# EAGLE board prod plus l-filters v2 (EAGLE 8.0.2)
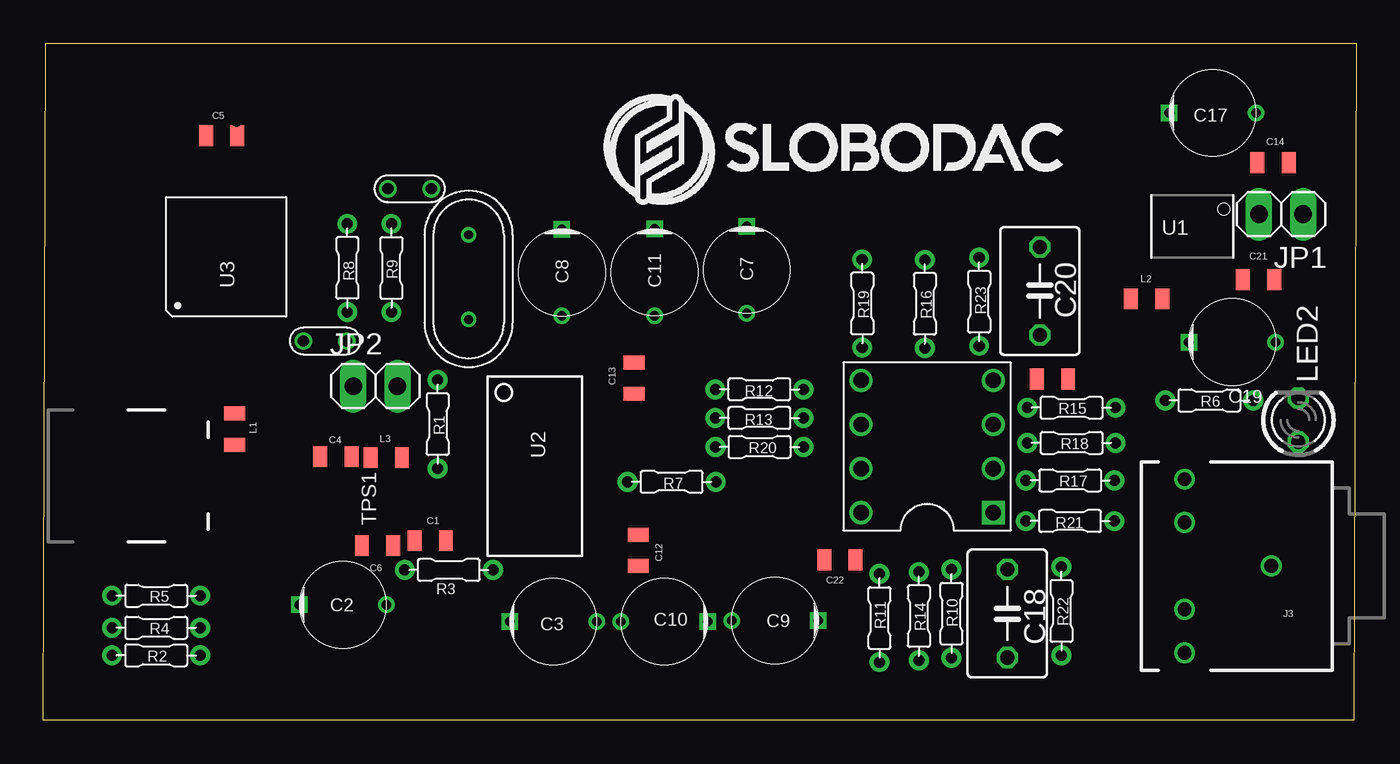
[diagram p0: board, top side]
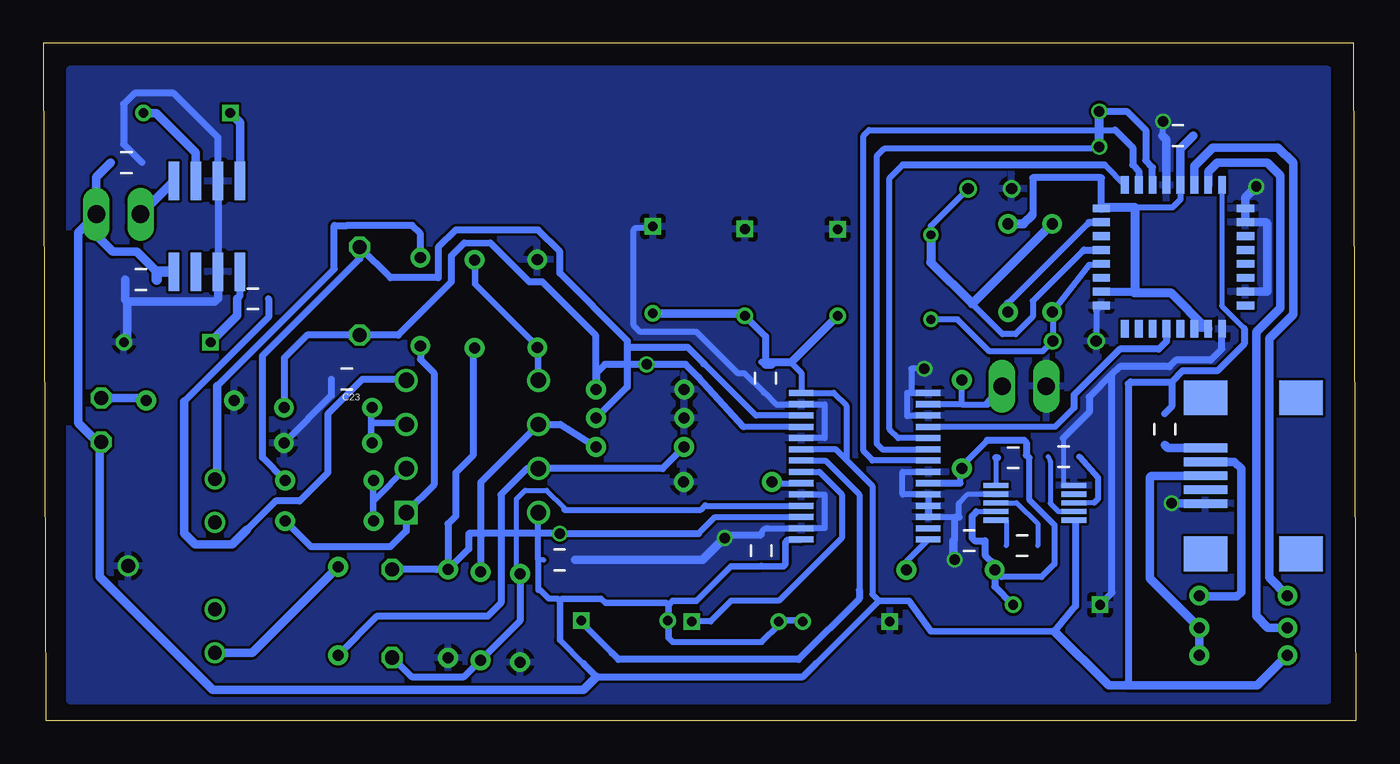
[diagram p1: board, bottom side, seen from below]

Size 75.62 x 39 mm. Coordinates in mm from the lower left corner, seen from the top.
Outline: 0.12,39 75.62,39 75.5,0 0,0 0.12,39
Copper layers (1*16): layer 1 0.035mm / dielectric 1.6mm / Bottom 0.035mm
Design rules "Elecrow_2-layer_PCB_eagle_rule *": minimum track width 0.29mm, minimum drill 12mil, track to track 6mil, track to pad 6mil, pad to pad 6mil, via to via 8mil, smd to smd 0mil, copper to edge 20mil, drill to drill 10mil, minimum pad ring 6mil, minimum via ring 6mil, stop-mask expansion 0mil, vias tented up to drill 100mil, thermal gap 10mil

## Footprints (pad centres in the part's own frame; a part is rotated, then mirrored left to right if it is on the bottom)
0805 = smd 0.8 x 1.2 bottom: 1 -0.9,0; 2 0.9,0
10UF/16V_PANA_M_CAP = drill 0.55 pad 0.95: + -2.5,0 | drill 0.55 pad 0.95 square: - 2.5,0
4.7PF_CAP = drill 0.65 pad 1: 1 -1.25,0; 2 1.25,0
C050-045X075 = drill 0.813 octagon: 1 -2.54,0; 2 2.54,0
USB-MINIB = smd 2.5 x 0.5 bottom: D+ 2.5,0; D- 2.5,0.8; GND 2.5,-1.6; ID 2.5,-0.8; VBUS 2.5,1.6 | smd 2.5 x 2 bottom: MTN1 -3,4.5; MTN2 2.5,4.5; MTN3 -3,-4.5; MTN4 2.5,-4.5
AUDIO-JACK = drill 0.8: RING 5,5; RSH 5,2.5; SLEEVE 0,0; TIP 5,-5; TSH 5,-2.5
1X02 = drill 1.016 long: 1 -1.27,0; 2 1.27,0
LED3MM = drill 0.813 octagon: A -1.27,0; K 1.27,0
DIP-8 = drill 0.889 square: 1 -3.81,0 | drill 0.889: 2 -3.81,-2.54; 3 -3.81,-5.08; 4 -3.81,-7.62; 5 3.81,-7.62; 6 3.81,-5.08; 7 3.81,-2.54; 8 3.81,0
1-8W_RES = drill 0.635 pad 1.143: P$1 2.54,0; P$2 -2.54,0
DGS-10-BOTTOM_LYR = smd 1.45 x 0.3 bottom: 1 -2.25,1; 2 -2.25,0.5; 3 -2.25,0; 4 -2.25,-0.5; 5 -2.25,-1; 6 2.25,-1; 7 2.25,-0.5; 8 2.25,0; 9 2.25,0.5; 10 2.25,1
SOIC-8_BOTTOM-LYR = smd 2.21 x 0.61 bottom: 1 -2.616,1.905; 2 -2.616,0.635; 3 -2.616,-0.635; 4 -2.616,-1.905; 5 2.616,-1.905; 6 2.616,-0.635; 7 2.616,0.635; 8 2.616,1.905
DB_R-PDSO-G28-BOTTOM_LYR = smd 0.348 x 1.397 bottom: 1 -4.225,-3.656; 2 -3.575,-3.656; 3 -2.925,-3.656; 4 -2.275,-3.656; 5 -1.625,-3.656; 6 -0.975,-3.656; 7 -0.325,-3.656; 8 0.325,-3.656; 9 0.975,-3.656; 10 1.625,-3.656; 11 2.275,-3.656; 12 2.925,-3.656; 13 3.575,-3.656; 14 4.225,-3.656; 15 4.225,3.656; 16 3.575,3.656; 17 2.925,3.656; 18 2.275,3.656; 19 1.625,3.656; 20 0.975,3.656; 21 0.325,3.656; 22 -0.325,3.656; 23 -0.975,3.656; 24 -1.625,3.656; 25 -2.275,3.656; 26 -2.925,3.656; 27 -3.575,3.656; 28 -4.225,3.656
PJT_(QFP-32)-BOTTOM_LYR = smd 1 x 0.45 bottom: 1 -4.15,2.8; 2 -4.15,2; 3 -4.15,1.2; 4 -4.15,0.4; 5 -4.15,-0.4; 6 -4.15,-1.2; 7 -4.15,-2; 8 -4.15,-2.8; 17 4.15,-2.8; 18 4.15,-2; 19 4.15,-1.2; 20 4.15,-0.4; 21 4.15,0.4; 22 4.15,1.2; 23 4.15,2; 24 4.15,2.8 | smd 0.45 x 1 bottom: 9 -2.8,-4.15; 10 -2,-4.15; 11 -1.2,-4.15; 12 -0.4,-4.15; 13 0.4,-4.15; 14 1.2,-4.15; 15 2,-4.15; 16 2.8,-4.15; 25 2.8,4.15; 26 2,4.15; 27 1.2,4.15; 28 0.4,4.15; 29 -0.4,4.15; 30 -1.2,4.15; 31 -2,4.15; 32 -2.8,4.15
CRYSTAL = drill 0.508 pad 0.889: 1 -4.877,0; 2 0,0

## Placement (x,y rotation side)
C1  150nF  [0805]  22.28,10.34 0 bottom
C2  10uF  [10UF/16V_PANA_M_CAP]  17.26,6.64 180 top
C3  4.7uF  [10UF/16V_PANA_M_CAP]  29.37,5.67 180 top
C4  1uF  [0805]  16.85,15.18 180 bottom
C5  1uf  [0805]  10.27,33.69 0 bottom
C6  1uF  [0805]  19.25,10.05 180 bottom
C7  10uF  [10UF/16V_PANA_M_CAP]  40.52,25.95 90 top
C8  10uF  [10UF/16V_PANA_M_CAP]  29.88,25.79 90 top
C9  47uf  [10UF/16V_PANA_M_CAP]  42.15,5.73 0 top
C10  47uf  [10UF/16V_PANA_M_CAP]  35.77,5.69 0 top
C11  10uF  [10UF/16V_PANA_M_CAP]  35.21,25.8 90 top
C12  150nF  [0805]  34.27,9.78 90 bottom
C13  150nF  [0805]  34.02,19.71 270 bottom
C14  150nF  [0805]  70.84,32.13 0 bottom
C15  4.7pF  [4.7PF_CAP]  21.1,30.62 180 top
C16  4.7pF  [4.7PF_CAP]  16.22,21.85 180 top
C17  47uF  [10UF/16V_PANA_M_CAP]  67.36,34.99 180 top
C18  220pF  [C050-045X075]  55.53,6.15 270 top
C19  47uF  [10UF/16V_PANA_M_CAP]  68.49,21.79 180 top
C20  220pF  [C050-045X075]  57.41,24.73 90 top
C21  150nF  [0805]  70.01,25.4 180 bottom
C22  220nF  [0805]  45.89,9.23 180 bottom
C23  220nF  [0805]  58.14,19.65 180 bottom
CN1  USB-MINIBBOTTOM  [USB-MINIB]  6.18,14.08 0 top
J3  [AUDIO-JACK]  70.74,8.89 180 top
JP1  [1X02]  71.3,29.16 180 top
JP2  [1X02]  19.12,19.25 0 top
L1  600-800R  [0805]  11.02,16.77 90 bottom
L2  600-800R  [0805]  63.55,24.28 0 bottom
L3  600-800R  [0805]  19.75,15.12 180 bottom
LED2  [LED3MM]  72.3,17.3 90 top
OPA2132  OPA2132DIP8  [DIP-8]  50.91,11.96 180 top
R1  10K  [1-8W_RES]  22.72,17.05 270 top
R2  1.5K  [1-8W_RES]  6.49,3.73 0 top
R3  10K  [1-8W_RES]  23.36,8.65 180 top
R4  22R  [1-8W_RES]  6.49,5.33 0 top
R5  22R  [1-8W_RES]  6.49,7.17 0 top
R6  820  [1-8W_RES]  67.17,18.42 0 top
R7  10K  [1-8W_RES]  36.2,13.73 180 top
R8  1M  [1-8W_RES]  17.51,26.06 270 top
R9  1.5K  [1-8W_RES]  20.05,26.06 90 top
R10  22  [1-8W_RES]  52.31,6.14 90 top
R11  22  [1-8W_RES]  48.17,5.89 90 top
R12  22  [1-8W_RES]  41.25,19.06 180 top
R13  22  [1-8W_RES]  41.25,17.41 180 top
R14  100  [1-8W_RES]  50.43,5.99 270 top
R15  100  [1-8W_RES]  59.23,18.01 0 top
R16  100  [1-8W_RES]  50.78,23.99 270 top
R17  100  [1-8W_RES]  59.15,13.82 0 top
R18  820  [1-8W_RES]  59.23,15.98 0 top
R19  820  [1-8W_RES]  47.17,24 270 top
R20  820  [1-8W_RES]  41.25,15.74 0 top
R21  820  [1-8W_RES]  59.15,11.47 180 top
R22  10  [1-8W_RES]  58.65,6.29 270 top
R23  10  [1-8W_RES]  53.91,24.11 270 top
TPS1  TPS60501DGS-10-BOTTOM  [DGS-10-BOTTOM_LYR]  18.51,12.52 0 top
U1  LM2662SO8-BOTTOM  [SOIC-8_BOTTOM-LYR]  66.2,28.45 270 top
U2  PCM1794ADB_R-PDSO-G28-BOTTOM  [DB_R-PDSO-G28-BOTTOM_LYR]  28.3,14.63 270 top
U3  PCM2707QFP-32-BOTTOM  [PJT_(QFP-32)-BOTTOM_LYR]  10.52,26.7 90 top
X1  12MHZ  [CRYSTAL]  24.49,27.97 90 top

## Library data of the parts
C1 C4-C6 C12-C14 C21 = SparkFun-Capacitors
C2 C3 C7-C11 C15-C17 C19 R1-R23 X1 = joe's favorites
C18 C20 = resistor
C22 C23 = SparkFun-Capacitors; PROD_ID: CAP-08402; VALUE: 22uF
CN1 J3 = SparkFun-Connectors
JP1 JP2 = pinhead
L1-L3 = SparkFun-Passives; PROD_ID: NDUC-13076
LED2 = led
OPA2132 = Opamps and Buffers
TPS1 U1-U3 = Audio ICs

## Nets
+5V: C3.+ C7.+ C8.+ C9.+ C10.+ C11.+ C12.1 C13.1 C14.1 C21.1 C22.2 JP1.1 L1.2 LED2.A OPA2132.8 R2.P$2 TPS1.5 U1.8 U2.15 U2.23 U2.28 U3.24
+12V: C20.1 R12.P$2 R15.P$1 U2.25
+15V: C20.2 R13.P$2 R17.P$1 U2.26
+18V: C18.2 R11.P$1 R14.P$1 U2.18
+24V: C18.1 R10.P$1 R16.P$1 U2.17
-5V: C23.1 L2.2 OPA2132.4
GND: C1.1 C2.- C3.- C5.1 C7.- C8.- C11.- C12.2 C13.2 C14.2 C15.2 C16.2 C19.+ C21.2 C22.1 C23.2 CN1.GND J3.SLEEVE JP2.1 R6.P$2 R7.P$2 R10.P$2 R11.P$2 R12.P$1 R13.P$1 R18.P$1 R19.P$2 TPS1.1 TPS1.9 U1.3 U1.6 U2.1 U2.3 U2.8 U2.10 U2.11 U2.12 U2.16 U2.19 U2.24 U2.27 U3.1 U3.9 U3.20 U3.25 U3.26 U3.31
N$1: C5.2 R9.P$1 U3.2 U3.3 U3.10 U3.16 U3.21
N$2: OPA2132.7 R20.P$2 R22.P$1
N$3: OPA2132.5 R16.P$2 R19.P$1
N$4: C9.- U2.22
N$5: U2.4 U3.5
N$6: J3.TIP R23.P$2
N$7: OPA2132.6 R14.P$2 R20.P$1
N$8: C10.- U2.21
N$9: R5.P$2 U3.22
N$10: CN1.D+ R2.P$1 R4.P$1
N$11: OPA2132.3 R15.P$2 R18.P$2
N$12: LED2.K R6.P$1
N$13: R3.P$2 U2.14
N$14: C15.1 R8.P$2 U3.13 X1.2
N$15: C4.2 TPS1.4
N$16: C4.1 TPS1.3
N$17: C6.2 TPS1.6
N$18: C6.1 TPS1.8
N$19: C16.1 R8.P$1 U3.12 X1.1
N$20: CN1.VBUS L1.1
N$21: CN1.D- R5.P$1
N$22: U2.6 U3.19
N$23: U2.5 U3.17
N$24: U2.7 U3.18
N$25: R7.P$1 U2.20
N$26: R9.P$2 U3.15
N$27: R4.P$2 U3.23
N$28: C19.- L2.1 U1.5
N$31: OPA2132.2 R17.P$2 R21.P$1
N$32: JP2.2 R1.P$2 U2.2
N$33: JP1.2 U1.1
N$34: J3.RING R22.P$2
N$35: L3.2 TPS1.10
N$36: OPA2132.1 R21.P$2 R23.P$1
N$44: C17.+ U1.2
N$45: C17.- U1.4
VCC: C1.2 C2.+ L3.1 R1.P$1 R3.P$1 TPS1.7 U2.9

## Tracks (layer width: path | path; a pad name or v marks a point on that pad's centre or on a via)
+5V
  Bottom 0.3: TPS1.5 16.17,11.43 | 7.75,30.62 7.75,23.88 6.45,22.57 | C22.2 47.1,9.23 47.12,9.25 | U2.15 32,10.41 32,10.38
  Bottom 0.35: OPA2132.8 47.12,11.94 47.12,9.25 47.12,7.5 47,7.5 46.5,7 46,7 45.88,6.88 | 39.38,4.5 34.25,4.5 | 38,6.88 36,8.88 | 27.5,6.88 27.88,7.25 27.88,13.5 29.38,15 | 45.88,4.62 44.5,3.25 | 32.56,20.61 31.96,20.01 U2.28 30.1,18.85 29.38,18.12 29.38,15 | 29.38,15 29.98,15.6 U2.23
  Bottom 0.381: 7.75,30.62 U3.24 | 32,10.38 32.75,10.38 32.88,10.25 32.88,9 33,8.88 34.25,8.88 C12.1 34.38,8.88 36,8.88 | C3.+ 31.88,5.75 33.25,5.75 C10.+ 33.25,5.5 34.25,4.5 | 39.38,4.5 39.62,4.75 39.62,5.62 C9.+ 39.62,5.88 39.62,6.62 | 38,6.88 39.38,6.88 39.62,6.62 | 34.25,20.62 C13.1 | 45.88,4.62 45.88,6.88 45.75,7 43.5,7 43.25,6.75 39.75,6.75 39.62,6.62 | 31.12,3.25 27.5,6.88 25.75,6.88 24.5,5.12 17.38,5.12 16.17,6.58
  Bottom 0.4: 44.5,3.25 43.75,2.5 31.88,2.5 31.12,3.25 | 6.45,22.57 6.45,21.68 8,20.12 10,20.12 10.62,19.5 | 10.62,19.5 13,19.5 13.12,19.38 13.12,2.15 | 10.62,19.5 10.62,18.07 L1.2 | 69.11,25.61 C21.1
  Bottom 0.406: 16.17,11.43 16.17,6.58 | C11.+ 34.02,22.11 C13.1
  Bottom 0.45: C8.+ 32.56,20.61 C13.1
  Bottom 0.5: 17.38,5.12 14.25,2 13.12,2 | C21.1 69.11,25.86 70.25,27 71.62,27 72.5,27.88 72.5,29.09 JP1.1 | C14.1 72.57,31.3 JP1.1 | 13.12,2 5.68,2 R2.P$2 | 13.12,2.15 13.12,2 | 43.75,2.5 44.5,1.75 65.88,1.75 72.38,8.25 72.38,15.96 LED2.A 72.53,16.03 73.62,17.12 73.62,28.11 JP1.1 | C7.+ 35.35,23.45 C11.+
  Bottom 0.508: 33.7,20.5 34.02,20.5 C13.1
  Bottom 0.6: C21.1 69.11,25.84 U1.8
+12V  (via drill 0.6 layers 16-16)
  Bottom 0.35: U2.25 35.28,16.91
  Bottom 0.375: 51.38,27.5 49.88,27.5
  Bottom 0.4: 37.88,19.75 38.62,20.5 v40.88,20.5 43.27,20.5 43.77,20 43.77,19.08 R12.P$2 43.79,22.16 46.88,25.25 47.62,25.25 49.88,27.5 | 51.38,27.5 52.12,26.75 52.12,25.25 55.19,22.19 C20.1
  Bottom 0.406: 35.28,16.91 37.88,19.75 | C20.1 60.44,22.19 61.75,20.88 61.75,18.02 R15.P$1
+15V
  Bottom 0.35: U2.26 34.57,17.55 37.52,20.5 37.62,20.5 | R17.P$1
  Bottom 0.381: 61.75,13.88 R17.P$1
  Bottom 0.4: R13.P$2 42,19.2 42,21.5 42,21.88 45.88,25.75 45.88,27 47.12,28.25 51.88,28.25 52.88,27.25 52.88,25.5 55.64,25.5 C20.2 57.41,27.22
  Bottom 0.406: 42,21.5 38.52,21.5 37.52,20.5 | R17.P$1 63,15.13 63,21 57.41,26.59 C20.2
+18V
  Bottom 0.3: R11.P$1 48.38,8.43 48.38,12.75 47.88,13.25 46.62,13.25 45.62,12.25 45.62,12.12
  Bottom 0.35: 45.62,12.12 37.75,12.12 37.5,12.38 37.48,12.35 U2.18 | 48.25,8.62 R11.P$1
  Bottom 0.4: R11.P$1 48.17,5.71 R14.P$1 51.38,2.5 54.42,2.5 C18.2
+24V  (via drill 0.6 layers 16-16)
  Bottom 0.35: U2.17 36.92,11.7 37.88,10.75
  Bottom 0.381: 50.88,21.38 R16.P$1
  Bottom 0.4: R10.P$1 52.31,11.31 51.88,11.75 51.88,14.25 50.88,15.25 50.88,21.35 R16.P$1 | R10.P$1 53,8.68 C18.1 | 50.24,10.75 51.12,10.75 51.12,9.87 R10.P$1
  Bottom 0.406: 37.88,10.75 v45.88,10.75 50.24,10.75
-5V
  Bottom 0.4: OPA2132.4 54.79,19.65 C23.1 59.25,17.64 59.25,14.25 60.88,12.62 62.25,12.62 63.88,11 | L2.2 62.65,23.22 67.5,18.38
  Bottom 0.5: 67.5,18.38 67.5,10.75 66.88,10.12 64.75,10.12 63.88,11
GND  (via drill 0.6 layers 16-16)
  Bottom 0.3: TPS1.9 22.35,13.02 22.88,12.5 | TPS1.1 16.88,13.52 16.88,16.25
  Bottom 0.35: C7.- 40.62,28.38 41.5,28.38 41.62,28.25 41.62,22.75 41.25,22.38 38,22.38 35.62,20 35.25,20 34.12,18.88 C13.2 33.41,18.2 U2.27 30.62,18.2 30.62,16.25 U2.24 | 33.9,11.05 U2.16 30.62,11.05 30.62,13 30.63,13.01 U2.19 | 33.9,11.05 arc-90 C12.2 arc90 33.9,11.05 | 25.62,18.85 U2.1 | U2.3 25.82,17.55 25.88,17.5 25.88,18.85 25.62,18.85 | U3.9 14.97,23.6 C16.2 | U2.11 U2.10 26.12,13 26.12,14.3 U2.8 | v24.88,20.25 25.62,20.25 25.62,18.85 | 22.88,11.7 22.88,12.5 | U2.12 23.12,11.7 | v11.12,34.5 11.17,34.2 C5.1
  Bottom 0.381: U3.26 6.38,28.75
  Bottom 0.4: C23.2 59.04,18.71 R18.P$1 | 16.88,16.25 15.38,17.75 15.38,18.62 14.06,19.94 13.62,20.38 10.75,20.38 10.38,20.75 | U1.3 65.57,33.57 68.12,36.12 70.38,36.12 71,35.5 71,33.19 C14.2
  Bottom 0.406: 22.88,11.7 23.12,11.7 23.12,10.4 C1.1 | U2.10 | U2.11 U2.12 | U1.3 U1.6 | C21.2 | 10.38,20.75 8.38,20.75 7.73,21.4 U3.1 | C12.2 36.2,10.68 v36.38,10.5 | C2.- 14.06,7.34 14.06,19.94
  Bottom 0.5: C22.1 37.65,9.23 v36.38,10.5 | C1.1 23.19,9.31 v23.12,9.25 | U3.31 5.12,24.7 5.12,28.62 5.2,28.7 U3.26 U3.25 6.38,30.12 v5.75,30.75 | C5.1 10.93,33.44 U3.20 | CN1.GND 10.61,12.48 v10.62,12.5 | C21.2 70.91,24.25 70.78,24.12 | 70.78,24.12 70.78,21.99 C19.+ | U1.6 65.57,24.31 65.75,24.12 70.78,24.12
  pour Bottom: 1.62,37.5 74.12,37.5 74.12,1.12 1.62,1.12
N$1
  Bottom 0.33: U3.3 U3.2
  Bottom 0.35: 12.75,29.55 10.57,29.55 10.12,30 U3.21
  Bottom 0.4: 18.65,29.11 18.62,29.11 18.62,31.25 14.67,31.25 U3.16
  Bottom 0.45: U3.10 12.81,24.7 arc90 12.75,24.63
  Bottom 0.5: C5.2 10.12,32.94 U3.21
  Bottom 0.508: U3.2 8.62,22.57 10.68,24.63 12.75,24.63 12.75,29.55 14.65,29.55 U3.16 14.59,29.58 | R9.P$1 19.16,28.6 18.65,29.11
N$2
  Bottom 0.4: R20.P$2 39.95,14.5 OPA2132.7 47.77,14.5 49.27,13 49.27,6.75 50.02,6 56.39,6 R22.P$1
N$3
  Bottom 0.381: OPA2132.5 47.12,19.62 47.12,21.38 R19.P$1 47.25,21.62 50.75,25.12 50.75,26.5 R16.P$2
N$4
  Bottom 0.35: 28.62,7.5 28.62,13 30.58,14.95 U2.22
  Bottom 0.381: 42.88,3.88 44.62,5.62 C9.-
  Bottom 0.4: 42.88,3.88 42.5,3.5 32.12,3.5 28.62,7 28.62,7.5
N$5
  Bottom 0.35: 16.25,18 17.34,16.91 U2.4
  Bottom 0.4: U3.5 10.93,21.83 11.38,21.38 13.62,21.38 16.25,18.75 16.25,18
N$6
  Bottom 0.4: R23.P$2 53.91,28.03 54.38,28.5 58.12,28.5
  Bottom 0.406: 58.12,28.5 58.88,28.5 58.88,26 65.62,19.25
  Bottom 0.5: 65.62,19.25 65.62,14 J3.TIP
N$7
  Bottom 0.381: 47.12,17 OPA2132.6
  Bottom 0.4: OPA2132.6 50.43,13.71 R14.P$2
  Bottom 0.406: OPA2132.6 45.84,17.04 R20.P$1
N$8
  Bottom 0.35: C10.- 37.19,5.69 36,6.88 33.25,6.88 29.62,10.5 29.62,13 30.93,14.3 U2.21
  Bottom 0.381: C10.- 38.25,5.75
N$9
  Bottom 0.5: R5.P$2 5,8.22 5,22 3.62,23.38 3.62,32.12 4.5,33 8.25,33 9.32,31.92 U3.22
N$10
  Bottom 0.5: R2.P$1 R4.P$1 11.88,8.17 11.88,14 11.79,14.08 CN1.D+
N$11
  Bottom 0.381: 56.75,17.12 56.75,18 R15.P$2 | 56.75,17.12 56.75,16 R18.P$2 | 56.75,17.12 54.75,17.12 OPA2132.3
N$12
  Bottom 0.5: LED2.K 69.86,18.57 R6.P$1
N$13
  Bottom 0.35: U2.14 25.9,9.15 R3.P$2
N$14
  Bottom 0.35: 22.11,24 22.11,23.99 20.38,22.25 19.62,22.25 18.62,23.25 18.62,24.15 15.76,27.01 | C15.1 24.49,28.48 X1.2
  Bottom 0.4: 15.76,27.01 15.68,27.09 U3.13
  Bottom 0.508: X1.2 24.49,26.38 22.11,24 R8.P$2
N$15
  Bottom 0.3: C4.2 17.62,14.94 17.62,12.5 17.15,12.02 TPS1.4
N$16
  Bottom 0.3: 15.1,12.52 TPS1.3
  Bottom 0.35: C4.1 14.88,13.98 14.88,12.75 15.1,12.52
N$17
  Bottom 0.3: TPS1.6 20.15,11.52 C6.2
N$18
  Bottom 0.3: TPS1.8 19.55,12.52 18.35,11.33 C6.1
N$19
  Bottom 0.35: U3.12 14.72,26.25 15.38,26.25 R8.P$1 17.47,23.48 C16.1 18.07,21.25 21.12,21.25 22.96,23.09 X1.1
N$20
  Bottom 0.5: L1.1 10.84,15.68 CN1.VBUS
N$21
  Bottom 0.5: R5.P$1 8.98,7.12 6.88,7.12 6.62,7.38 6.62,14.5 7.01,14.88 CN1.D-
N$22  (via drill 0.6 layers 16-16)
  Bottom 0.35: U2.6 27.29,15.6 27.62,15.94 27.62,32.5 27.2,32.92 14.92,32.92 v14.8,33.04
  Bottom 0.4: U3.19 11.73,31.85 12.12,32.25 12.12,34 13.21,35.08 v14.8,35.08
  Bottom 0.508: v14.8,33.04 v14.8,35.08
N$23
  Bottom 0.35: U2.5 26.37,16.26 | 14.48,32 U3.17 | 26.37,16.26 | 26.37,16.26 26.88,16.76 26.88,31.24 26.12,32
  Bottom 0.4: 26.12,32 14.48,32
N$24
  Bottom 0.35: U2.7 27.87,14.95 27.87,14.99 28.38,15.5 28.38,33.68 28.05,34 13.88,34
  Bottom 0.4: 13.88,34 12.88,33 12.88,32 12.52,31.65 U3.18
N$25
  Bottom 0.35: R7.P$1 33.58,13.66 U2.20
N$26
  Bottom 0.35: 15.45,28.6 20.05,24 R9.P$2
  Bottom 0.4: 15.45,28.6 15.35,28.7 U3.15
  Bottom 0.508: R9.P$2 20.05,24
N$27
  Bottom 0.5: R4.P$2 5.08,5.33 5.75,6 5.75,22.38 4.38,23.75 4.38,31.38 5.12,32.12 8,32.12 8.52,31.6 U3.23
N$28
  Bottom 0.406: L2.1 64.3,24.44 U1.5
  Bottom 0.5: L2.1 64.45,23.32 C19.-
N$31
  Bottom 0.381: 56.62,12.75 56.62,13.75 R17.P$2 | 56.62,12.75 56.62,11.5 R21.P$1 | OPA2132.2 54.75,14.5 56.5,12.75 56.62,12.75
N$32
  Bottom 0.35: 22.75,18.2 21.38,18.2 | 22.75,18.2 U2.2 | 21.38,18.2 21.19,18.2 | 21.38,18.2 JP2.2 | R1.P$2 22.75,19.56 22.75,18.2
N$33
  Bottom 0.5: U1.1 68.12,31.07 JP1.2
N$34
  Bottom 0.5: J3.RING 63.59,3.89 R22.P$2
N$35
  Bottom 0.3: L3.2 20.76,15.02 TPS1.10
  Bottom 0.406: 20.76,15.12 L3.2
N$36
  Bottom 0.4: R21.P$2 60.22,10 55.62,10 54.72,10.9 | R23.P$1 53.91,20.78 53.12,20 53.12,13.56 OPA2132.1
  Bottom 0.406: OPA2132.1 54.72,10.9
N$44
  Bottom 0.5: C17.+ 69.12,34.99 66.84,32.71 U1.2
N$45
  Bottom 0.5: C17.- 64.3,34.43 U1.4
VCC
  Bottom 0.3: 21.88,12 21.85,12.02 TPS1.7
  Bottom 0.35: 19.73,6.64 C2.+ | R3.P$1 20.42,8.25 18.12,8.25 17.38,9 17.38,11.25 18.85,12.73 L3.1 | 21.25,16.12 22.72,14.66 R1.P$1 22.82,14.41 22.82,13.66
  Bottom 0.406: C2.+ 20.82,7.7 R3.P$1 20.82,8.95 21.38,9.5 C1.2 21.97,10.34 22.12,10.5 22.12,11.75 21.88,12 | 22.82,13.66 U2.9 | 21.25,16.12 19.12,16.12 19,16 19,15.27 L3.1